# Altium PCB dac.PcbDoc
Units mil, origin at the board's own origin, x right, y up, seen from the top; angles counter-clockwise.
Board outline 6000 x 4000 mil, 2 copper layers (Top Layer, Bottom Layer); 17 components, 17 nets, 68 pads, 0 vias.
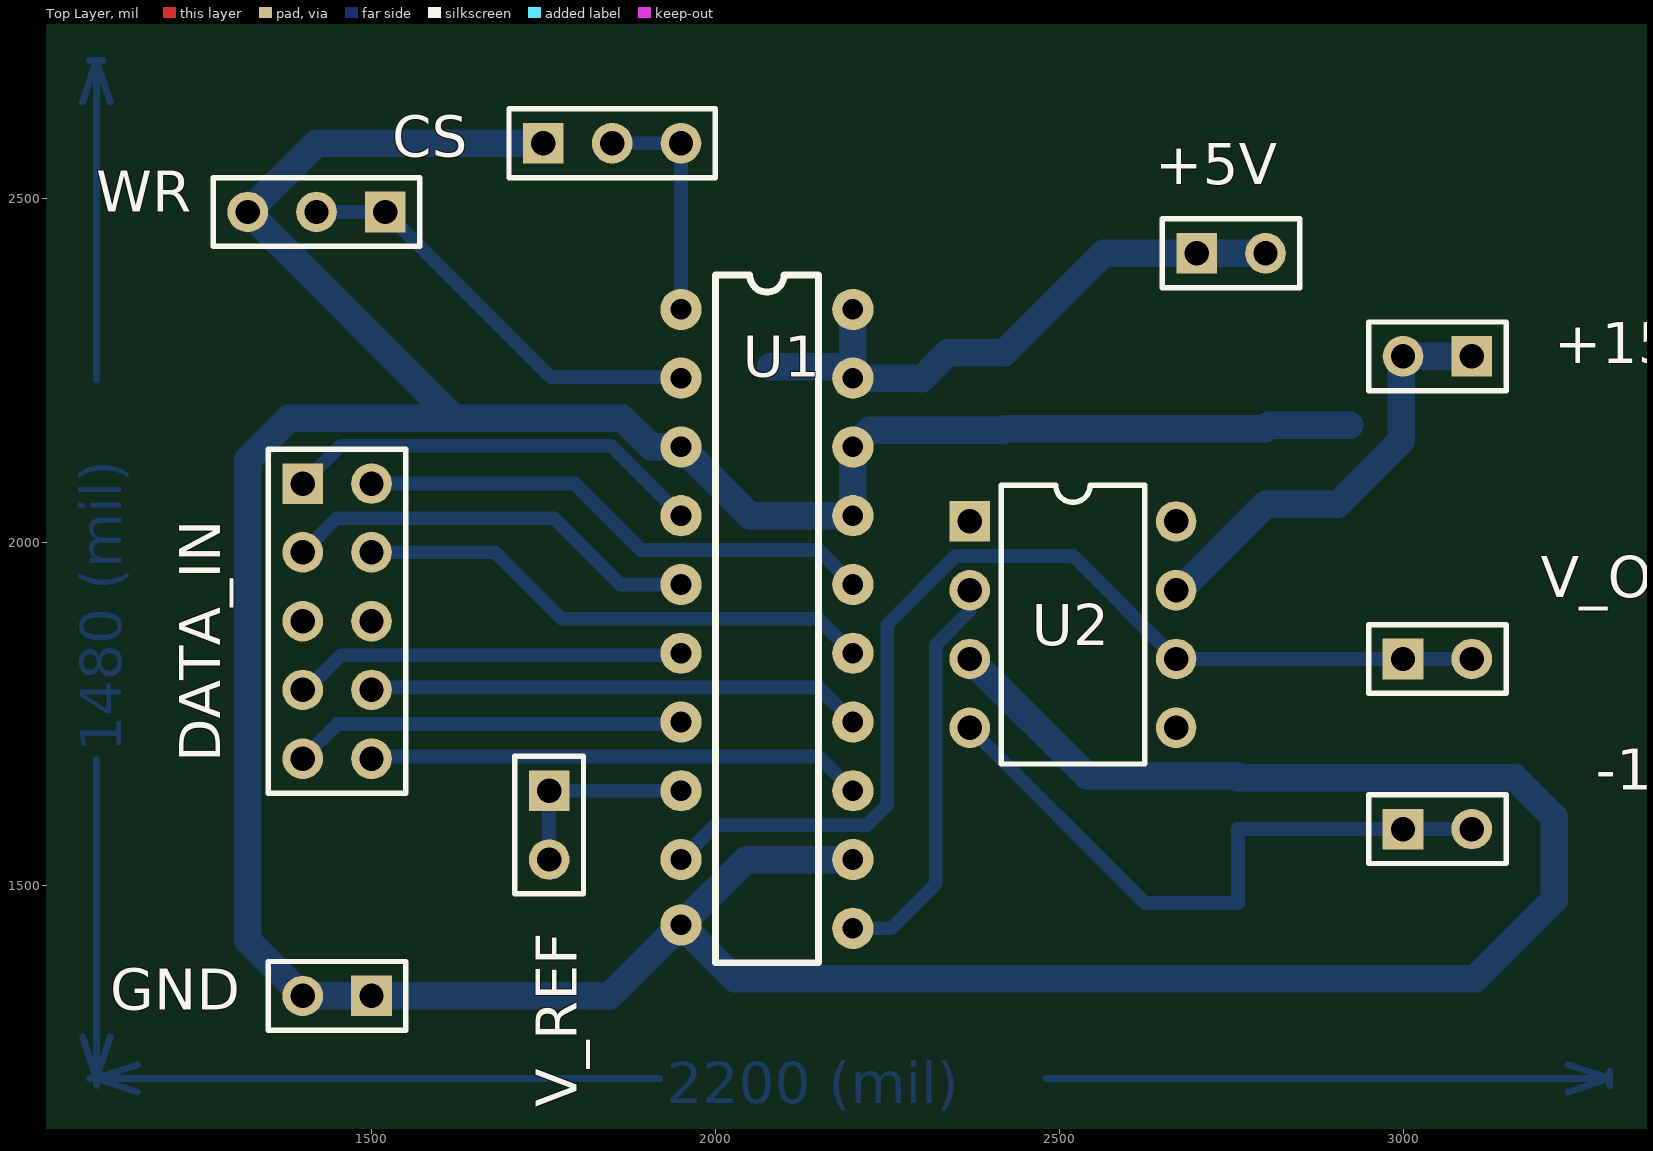
[diagram p0: Top Layer view]
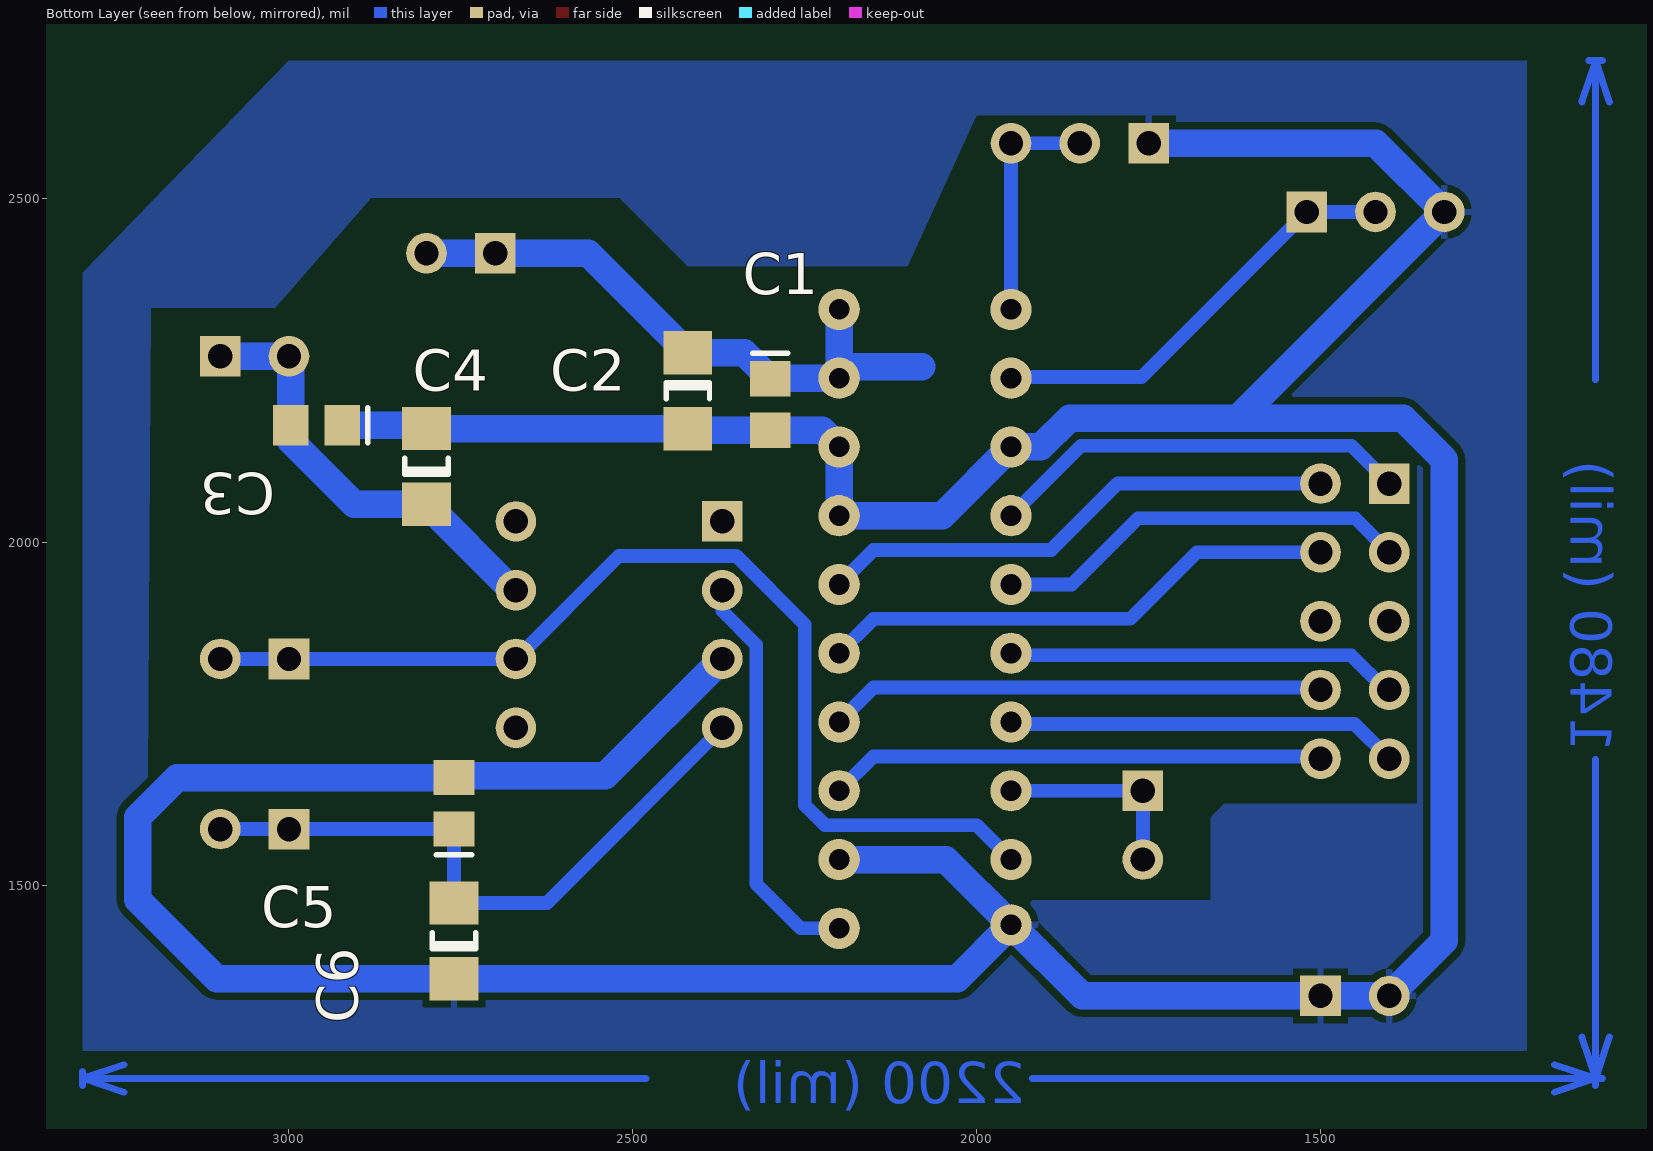
[diagram p1: Bottom Layer view, seen from below]

## Layer stack, top to bottom
Top Layer: signal copper 1.4
Dielectric: dielectric 12.6, FR-4, Dk 4.8
Bottom Layer: signal copper 1.4

## Board outline
1000,1000 7000,1000 7000,5000 1000,5000

## Design rules (kind name [scope] priority, off if disabled: settings)
Clearance [All] p1: gap=10
PolygonConnect [All] p1: connectstyle=Relief reliefconductorwidth=10 reliefentries=4 polygonreliefangle="90 Angle"
RoutingVias [All] p1: holewidth=28 width=50 viastyle="Through Hole" minholewidth=28 minwidth=50 maxholewidth=28 maxwidth=50
SilkscreenOverComponentPads [All] p1: minsilkscreentomaskgap=10
SolderMaskExpansion [All] p1: expansion=4
TestPointUsage [All] p1: valid=0 allowmultiple=FALSE
Testpoint [All] p1: side=15 testpointundercomponent=TRUE minsize=40 maxsize=100 preferedsize=60 minholesize=0 maxholesize=40 preferedholesize=32 testpointgrid=1 style=1023 order=0-112345678
Width [All] p1: maxlimit=50 minlimit=20 preferedwidth=20
23 further rules are at their usual default settings.

## Components (designator, comment, footprint, x,y, rotation, side; value= is the part's Value field where it differs from the comment)
+5V "+5V" HDR1X2 2700,2420 r0 top
+15V "+15V" HDR1X2 3100,2270 r180 top
-15V "-15V" HDR1X2 3000,1582.6 r0 top
C1 "Cap" C0805 2300,2200 r270 bottom
C2 "Cap Pol1" C1206 2420,2220 r270 bottom
C3 "Cap" C0805 2960,2170 r0 bottom
C4 "Cap Pol1" C1206 2800,2110 r90 bottom
C5 "Cap" C0805 2760,1620 r90 bottom
C6 "Cap Pol1" C1206 2760,1420 r90 bottom
CS "片选接口" HDR1X3 1750,2580 r0 top
DATA_IN "数据输入接口" HDR2X5 1400,2085 r270 top
GND "GND" HDR1X2 1500,1340 r180 top
U1 "DAC0832" DIP-20 2050,2338.31 r0 top
U2 "0P07" DIP-8 2520,1880 r270 top
V_OUT "输出电压接口" HDR1X2 3000,1830 r0 top
V_REF "参考电压接口" HDR1X2 1758.31,1638.31 r270 top
WR "WR接口" HDR1X3 1520,2480 r180 top

## Footprints (in the part's own frame and the unit in brackets; to place one, negate y for a bottom-side part, rotate by r counter-clockwise, add the part's x,y. Pads: shape width x height; smd on the part's side, far side on the other; paste and mask are expansions set on the pad)
C0805 [mm] "Chip Capacitor; Body 2.0 x 1.2 mm (LxW typ)"
  rect 1.3x1.5 smd: 1(-0.95,0) 2(0.95,0)
  silkscreen extent -1.9,-0.65 -1.9,0.65
C1206 [mm] "Chip Capacitor; Body 3.2 x 1.6 mm (LxW typ)"
  rect 1.6x1.8 smd: 1(-1.4,0) 2(1.4,0)
  silkscreen extent -0.3,-0.8 0.3,0.8
DIP-8 [mm] "DIP; 8 Leads; Row Spacing 7.62 mm; Pitch 2.54 mm"
  rect 1.5x1.5 hole 0.9: 1(-3.81,-3.81)
  round 1.5 hole 0.9: 2(-1.27,-3.81) 3(1.27,-3.81) 4(3.81,-3.81) 5(3.81,3.81) 6(1.27,3.81) 7(-1.27,3.81) 8(-3.81,3.81)
  silkscreen extent -5.15,-2.65 5.15,2.65
DIP-20 [mil]
  round 60 hole 30: 1(-100,0) 2(-100,-100) 3(-100,-200) 4(-100,-300) 5(-100,-400) 6(-100,-500) 7(-100,-600) 8(-100,-700) 9(-100,-800) 10(-100,-895) 11(150,-900) 12(150,-800) 13(150,-700) 14(150,-600) 15(150,-500) 16(150,-400) 17(150,-300) 18(150,-200) 19(150,-100) 20(150,0)
  silkscreen extent -50,-950 100,50
HDR1X2 [mm] "Connector; Header; 2 Position"
  rect 1.5x1.5 hole 0.9: 1(0,0)
  round 1.5 hole 0.9: 2(2.54,0)
  silkscreen extent -1.27,-1.27 3.81,1.27
HDR1X3 [mm] "Connector; Header; 3 Position"
  rect 1.5x1.5 hole 0.9: 1(0,0)
  round 1.5 hole 0.9: 2(2.54,0) 3(5.08,0)
  silkscreen extent -1.27,-1.27 6.35,1.27
HDR2X5 [mm] "Connector; Header; 5x2 Position"
  rect 1.5x1.5 hole 0.9: 1(0,0)
  round 1.5 hole 0.9: 2(0,2.54) 3(2.54,0) 4(2.54,2.54) 5(5.08,0) 6(5.08,2.54) 7(7.62,0) 8(7.62,2.54) 9(10.16,0) 10(10.16,2.54)
  silkscreen extent -1.27,-1.27 11.43,3.81

## Part data
+5V +15V -15V GND V_OUT V_REF: library part "Header 2H", "Header, 2-Pin, Right Angle"
C1 C3 C5: "Capacitor"
C2 C4 C6: "Polarized Capacitor (Radial)"
CS WR: library part "Header 3H", "Header, 3-Pin, Right Angle"
DATA_IN: library part "Header 5X2", "Header, 5-Pin, Dual row"
U2: library part OP07

## Nets (pads, with @x,y where several pads share a name; then routed paths per layer and width w, separated by ;. In a path a pad name is that pad's centre, name@x,y a point inside that pad or via, vN(x,y) a via of type N, cw(c..) or ccw(c..) an arc to the next point about the centre after c; other vN are vias at no path point)
+15: +15V.1 +15V.2 C3.2 C4.1 U2.7 | length 641.1
  Bottom Layer w40: U2.7 2675.12,1930 C4.1 2905.03,2054.88 2997.4,2147.26 C3.2 2997.4,2267.4 3000.12,2270.12 +15V.1@3099.88,2270.12
-15: -15V.1 -15V.2 C5.1 C6.2 U2.4 | length 940.5
  Bottom Layer w20: U2.4 2624.88,1475.12 C6.2 C5.1 -15V.1@2997.4,1582.6 ; -15V.1 -15V.2
DIN_0: DATA_IN.9 U1.7 | length 572.1
  Bottom Layer w20: DATA_IN.9 1450.47,1735.47 1947.17,1735.47 U1.7
DIN_1: DATA_IN.7 U1.6 | length 582.1
  Top Layer w20: U1.6@1940,1840 U1.6@1950,1840
  Bottom Layer w20: DATA_IN.7 1405,1785 1455.47,1835.47 1947.17,1835.47 U1.6
DIN_2: DATA_IN.3 U1.5 | length 610.4
  Bottom Layer w20: DATA_IN.3 1449.53,2034.53 1629.53,2034.53 1765.47,2034.53 1861.69,1938.31 U1.5
DIN_3: DATA_IN.1 U1.4 | length 614.9
  Bottom Layer w20: DATA_IN.1 1455,2140 1848.31,2140 U1.4
DIN_4: DATA_IN.2 U1.16 | length 760.8
  Bottom Layer w20: DATA_IN.2 1795,2085 1891.69,1988.31 2150,1988.31 U1.16
DIN_5: DATA_IN.4 U1.15 | length 760.8
  Bottom Layer w20: DATA_IN.4 1680,1985 1776.69,1888.31 2150,1888.31 U1.15
DIN_6: DATA_IN.8 U1.14 | length 722.1
  Bottom Layer w20: DATA_IN.8 1503.31,1788.31 2150,1788.31 U1.14
DIN_7: DATA_IN.10 U1.13 | length 722.1
  Bottom Layer w20: DATA_IN.10 1503.31,1688.31 2150,1688.31 U1.13
GND: C1.2 C2.2 C3.1 C4.2 C5.2 C6.1 CS.1 GND.1 GND.2 U1.3 U1.10 U1.12 U1.17 U1.18 U2.3 WR.3 | length 6807.4
  Top Layer w40: U1.18 U1.18@2200,2140
  Bottom Layer w40: CS.1 1420,2580 WR.3 1620,2180 ; U1.12 2045,1538.31 U1.10 ; U2.3 2540,1660 2757.4,1660 C5.2 3162.6,1657.4 3220,1600 3220,1480 3104.88,1364.88 C6.1 2028.43,1364.88 U1.10 ; C3.1 2804.88,2170 2799.76,2164.88 C2.2 2417.72,2162.6 C1.2 2224.29,2162.6 U1.18 U1.17 2050,2038.31 U1.3 1906.57,2138.31 1864.88,2180 1620,2180 ; 1620,2180 1380,2180 1320,2120 1320,1420 GND.2 GND.1 1846.69,1340 U1.10
NetCS_2: CS.2 CS.3 U1.1 | length 341.7
  Bottom Layer w20: CS.2 CS.3 U1.1
NetU1_2: U1.2 WR.1 WR.2 | length 630.1
  Bottom Layer w20: WR.2 WR.1 1760,2240 1948.31,2240 U1.2
NetU1_8: U1.8 V_REF.1 V_REF.2 | length 291.7
  Bottom Layer w20: V_REF.2 V_REF.1 U1.8
NetU1_9: U1.9 U2.6 V_OUT.1 V_OUT.2 | length 1548.4
  Bottom Layer w20: U1.9 2000,1588.31 2220.71,1588.31 2250,1617.6 2250,1880.04 2349.49,1979.53 2520.47,1979.53 U2.6 V_OUT.1 V_OUT.2
NetU1_11: U1.11 U2.2 | length 594.8
  Bottom Layer w20: U1.11 2255.84,1438.31 2320.47,1502.94 2320.47,1850.51 2370,1900.04 U2.2
VCC: +5V.1 +5V.2 C1.1 C2.1 U1.19 U1.20 | length 906.5
  Bottom Layer w40: 2080,2255.12 2183.19,2255.12 U1.19 ; U1.19@2201.69,2240 U1.19 ; U1.20@2201.69,2340 U1.20 U1.19 ; C1.1@2299.09,2238.31 U1.19 ; C1.1 2337.72,2275.12 C2.1 2564.88,2420 +5V.2
pads on no net: DATA_IN.5 DATA_IN.6 U2.1 U2.5 U2.8
copper on no net: | length 3152.3
  Bottom Layer w10: 1080,1280 1100,1220 ; 1080,2640 1100,2700 ; 1090,1220 1110,1220 ; 1090,2700 1110,2700 ; 1100,1210 1100,1230 ; 1100,1684.08 1100,1220 ; 1100,2235.92 1100,2700 ; 1120,1280 1100,1220 ; 1120,2640 1100,2700 ; 1160,1200 1100,1220 ; 1160,1240 1100,1220 ; 1919.09,1220 1100,1220 ; 2480.91,1220 3300,1220 ; 3240,1200 3300,1220 ; 3240,1240 3300,1220 ; 3300,1210 3300,1230

## Polygon pours and split planes (outlines as drawn)
GND on Bottom Layer "Bottom Layer-No Net" (solid, pour order 1000): 1200,2700 3000,2700 3300,2391.43 3300,1260 1200,1260

## Other copper
Bottom Layer:
  pour cut-out: 1380,2460 1620,2220 1620,2160 1380,2160 1360,2140 1360,1620 1640,1620 1660,1600 1660,1480 1920,1480 2040,1360 3100,1360 3205.78,1465.78 3200,2340 3020,2340 2880,2500 2520,2500 2420,2400 2100,2400 2000,2620 1880,2620 1780,2619.53 1780,2580 1380,2580
  text "1480 (mil)" at 1135.99,1694.08 h60 r90
  text "2200 (mil)" at 1929.09,1184.01 h60